# EAGLE board esp32_lora_gateway (EAGLE 9.1.3)
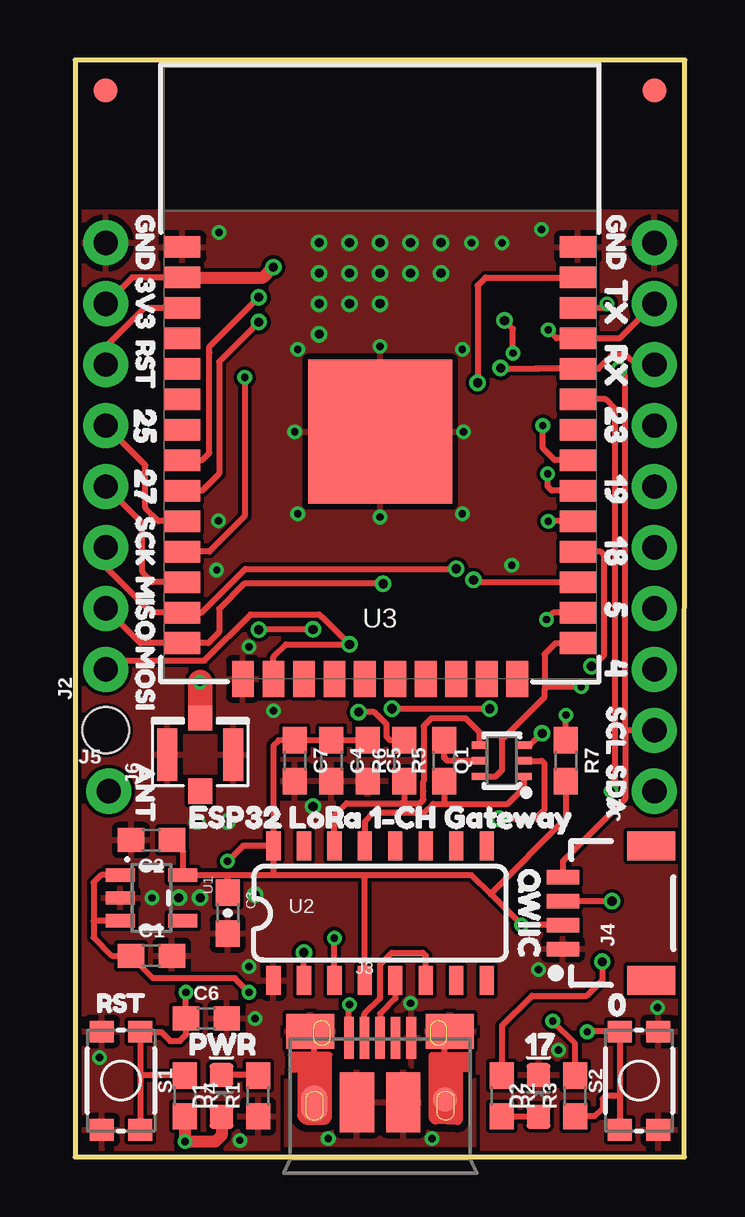
[diagram p0: board, top side]
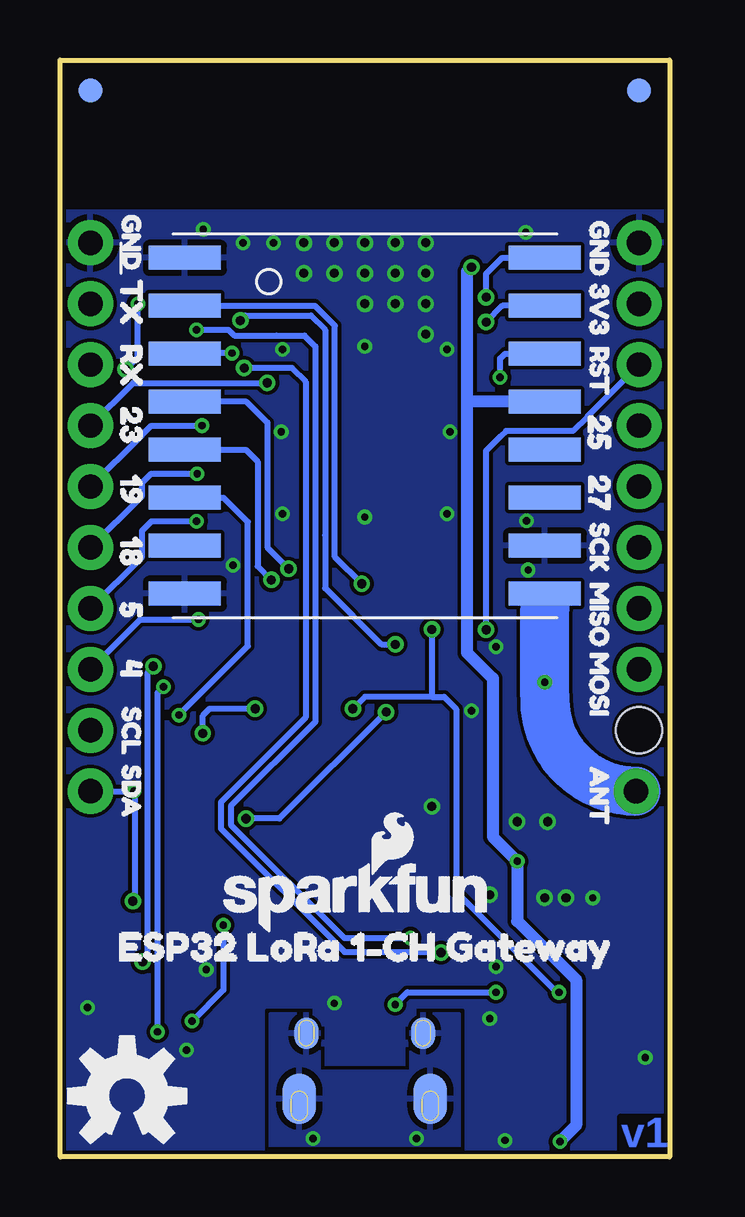
[diagram p1: board, bottom side, seen from below]

Size 25.4 x 45.72 mm. Coordinates in mm from the lower left corner, seen from the top.
Outline: 0,0 25.38,0 25.4,45.72 0,45.72 0,0
Copper layers (1*16): Top 0.035mm / dielectric 1.5mm / Bottom 0.035mm
Design rules "SparkFun-2-layer-PCBWay-LIMIT": minimum track width 6mil, minimum drill 0.3mm, track to track 6mil, track to pad 6mil, pad to pad 6mil, via to via 6mil, smd to smd 6mil, copper to edge 6mil, drill to drill 6mil, minimum pad ring 6mil, minimum via ring 6mil, stop-mask expansion 4mil, vias tented up to drill 25mil, thermal gap 10mil
Net classes: 0 default: width 0.152 mm, drill 0.305 mm; 1 power: width 0.178 mm
Holes 1.93 mm at 1.27,17.78

## Footprints (pad centres in the part's own frame; a part is rotated, then mirrored left to right if it is on the bottom)
0603 = smd 1.1 x 1: 1 -0.85,0; 2 0.85,0
0603-CAP = smd 1.1 x 1: 1 -0.85,0; 2 0.85,0
LED-0603 = smd 1 x 1: A -0.877,0; C 0.877,0
FIDUCIAL-1X2 = smd 1 x 1: 1 0,0
1X10_NO_SILK = drill 1.016 pad 1.88: 1 0,0; 2 2.54,0; 3 5.08,0; 4 7.62,0; 5 10.16,0; 6 12.7,0; 7 15.24,0; 8 17.78,0; 9 20.32,0; 10 22.86,0
1X08_NO_SILK = drill 1.016 pad 1.88: 1 0,0; 2 2.54,0; 3 5.08,0; 4 7.62,0; 5 10.16,0; 6 12.7,0; 7 15.24,0; 8 17.78,0
USB-MICROB-PTH-MILL = smd 0.4 x 1.75: D+ 0,0; D- -0.65,0; GND 1.3,0; ID 0.65,0; VBUS -1.3,0 | smd 2 x 1.46: SHIELD -2.9,0.275; SHIELD2 2.9,0.275 | smd 1.425 x 2.5: SHIELD3 -0.963,-2.675; SHIELD4 0.963,-2.675 | smd 1.4 x 2.1 bottom: SHIELD5 -2.731,-2.531; SHIELD7 2.729,-2.531 | smd 1 x 1: SHIELD6 2.7,-2.575 | smd 1.1 x 1.5: SHIELD8 -2.731,-2.731 | smd 1 x 1.3 bottom: SHIELD9 -2.43,0.195; SHIELD10 2.43,0.195
1X04_1MM_RA = smd 0.6 x 1.35: 1 -1.5,0; 2 -0.5,0; 3 0.5,0; 4 1.5,0 | smd 1.2 x 2: NC1 2.8,-3.675; NC2 -2.8,-3.675
1X01_NO_SILK = drill 1.016 pad 1.88: 1 0,0
U.FL = smd 2.2 x 0.85: 1 0,1.375; 2 0,-1.375 | smd 1.05 x 1: FEED 1.525,0; NC -1.525,0
SC70-6 = smd 0.3 x 0.66: 1 -0.65,-0.92; 2 0,-0.92; 3 0.65,-0.92; 4 0.65,0.92; 5 0,0.92; 6 -0.65,0.92
TACTILE_SWITCH_SMD_4.6X2.8MM = smd 0.9 x 1: 1 -2.05,-0.8; 2 2.05,-0.8; 3 2.05,0.8; 4 -2.05,0.8
SOT23-5 = smd 0.55 x 1.2: 1 -0.95,-1.3; 2 0,-1.3; 3 0.95,-1.3; 4 0.95,1.3; 5 -0.95,1.3
SO016 = smd 0.6 x 1.2: 1 -4.445,-2.8; 2 -3.175,-2.8; 3 -1.905,-2.8; 4 -0.635,-2.8; 5 0.635,-2.8; 6 1.905,-2.8; 7 3.175,-2.8; 8 4.445,-2.8; 9 4.445,2.8; 10 3.175,2.8; 11 1.905,2.8; 12 0.635,2.8; 13 -0.635,2.8; 14 -1.905,2.8; 15 -3.175,2.8; 16 -4.445,2.8
ESP-WROOM-32-NARROW = smd 0.9 x 1.5: 1 6.43,8.238; 2 5.16,8.238; 3 3.89,8.238; 4 2.62,8.238; 5 1.35,8.238; 6 0.08,8.238; 7 -1.19,8.238; 8 -2.46,8.238; 9 -3.73,8.238; 10 -5,8.238; 11 -6.27,8.238; 12 -7.54,8.238; 13 -8.81,8.238; 14 -10.08,8.238; 25 -10.08,-8.238; 26 -8.81,-8.238; 27 -7.54,-8.238; 28 -6.27,-8.238; 29 -5,-8.238; 30 -3.73,-8.238; 31 -2.46,-8.238; 32 -1.19,-8.238; 33 0.08,-8.238; 34 1.35,-8.238; 35 2.62,-8.238; 36 3.89,-8.238; 37 5.16,-8.238; 38 6.43,-8.238 | smd 1.5 x 0.9: 15 -11.57,5.715; 16 -11.57,4.445; 17 -11.57,3.175; 18 -11.57,1.905; 19 -11.57,0.635; 20 -11.57,-0.635; 21 -11.57,-1.905; 22 -11.57,-3.175; 23 -11.57,-4.445; 24 -11.57,-5.715 | smd 6 x 6: GND -1.27,0
RFM95/96/97/98W = smd 3 x 1: 3.3V 7.5,1; !RESET -7.5,-3; ANT 7.5,-7; DIO0 7.5,3; DIO1 7.5,5; DIO2 7.5,7; DIO3 7.5,-3; DIO4 7.5,-1; DIO5 -7.5,-5; GND@1 -7.5,7; GND@2 -7.5,-7; GND@3 7.5,-5; MISO -7.5,5; MOSI -7.5,3; NSS -7.5,-1; SCK -7.5,1

## Placement (x,y rotation side)
C1  1.0uF  [0603]  3.17,8.38 0 top
C2  1.0uF  [0603]  3.17,13.21 180 top
C3  0.1uF  [0603-CAP]  6.35,10.16 270 top
C4  0.1uF  [0603]  10.67,16.51 270 top
C5  10uF  [0603]  12.19,16.51 270 top
C6  0.1uF  [0603]  5.46,5.77 0 top
C7  4.7uF  [0603]  9.14,16.51 270 top
D1  RED  [LED-0603]  6.1,2.54 90 top
D2  BLUE  [LED-0603]  19.3,2.54 90 top
FD1  FIDUCIAL1X2  [FIDUCIAL-1X2]  24.13,44.45 0 top
FD2  FIDUCIAL1X2  [FIDUCIAL-1X2]  24.13,44.45 0 bottom
FD3  FIDUCIAL1X2  [FIDUCIAL-1X2]  1.27,44.45 0 top
FD4  FIDUCIAL1X2  [FIDUCIAL-1X2]  1.27,44.45 0 bottom
FRAME1  FRAME-LETTER  [CREATIVE_COMMONS]  2.54,-7.62 0 top  (outside the outline)
J1  [1X10_NO_SILK]  24.13,15.24 90 top
J2  [1X08_NO_SILK]  1.27,20.32 90 top
J3  USB  [USB-MICROB-PTH-MILL]  12.7,4.95 0 top
J4  QWIIC  [1X04_1MM_RA]  20.32,10.16 90 top
J5  [1X01_NO_SILK]  1.4,15.24 0 top
J6  U.FL  [U.FL]  5.21,16.76 90 top
LOGO1  OSHW-LOGOM  [OSHW-LOGO-M]  22.61,2.54 0 bottom
LOGO2  REVISION  [REVISION]  13.97,-11.43 0 top  (outside the outline)
LOGO3  SFE_LOGO_NAME.1_INCH  [SFE_LOGO_NAME_.1]  19.05,8.89 0 bottom
LOGO4  SFE_LOGO_FLAME.1_INCH  [SFE_LOGO_FLAME_.1]  12.7,11.43 0 bottom
Q1  MBT3904DW1T1  [SC70-6]  17.78,16.51 90 top
R1  1k  [0603]  7.62,2.54 90 top
R2  1k  [0603]  17.78,2.54 270 top
R3  10k  [0603]  20.83,2.54 90 top
R4  10k  [0603]  4.57,2.54 270 top
R5  10k  [0603]  15.37,16.51 90 top
R6  10k  [0603]  13.72,16.51 90 top
R7  10k  [0603]  20.45,16.51 270 top
S1  RESET  [TACTILE_SWITCH_SMD_4.6X2.8MM]  1.91,3.17 270 top
S2  0  [TACTILE_SWITCH_SMD_4.6X2.8MM]  23.5,3.17 90 top
U1  3.3V  [SOT23-5]  3.17,10.79 270 top
U2  CH340C  [SO016]  12.7,10.16 0 top
U3  ESP-WROOM-32NARROW  [ESP-WROOM-32-NARROW]  12.7,31.5 90 top
U4  RFM96W  [RFM95/96/97/98W]  12.7,30.48 0 bottom
U$1  [GND0]  2.92,39.94 270 top
U$2  [3V31]  2.92,37.34 270 top
U$3  [RST2]  2.92,34.73 270 top
U$4  [2517]  2.92,32 270 top
U$5  [279]  2.92,29.46 270 top
U$6  [SCK3]  2.92,27.37 270 top
U$7  [MISO4]  2.92,24.89 270 top
U$8  [MOSI5]  2.92,21.97 270 top
U$9  [ANT6]  2.92,17.12 270 top
U$10  [GND0]  22.54,39.94 270 top
U$11  [TX16]  22.54,37.34 270 top
U$12  [RX15]  22.54,34.67 270 top
U$13  [2314]  22.54,32.07 270 top
U$14  [1912]  22.54,29.21 270 top
U$15  [1811]  22.54,26.67 270 top
U$16  [513]  22.54,23.94 270 top
U$17  [410]  22.54,21.53 270 top
U$18  [SCL8]  22.54,19.43 270 top
U$19  [SDA7]  22.54,17.02 270 top
U$20  [RST2]  0.19,6.41 0 top
U$21  [020]  21.4,6.35 0 top
U$22  [PWR19]  3.94,4.7 0 top
U$23  [1722]  17.97,4.7 0 top
U$24  [QWIIC18]  18.92,12.95 270 top
U$25  [ESP32_LORA_1#CH_GATEWAY21]  3.94,14.16 0 top
U$26  [GND0]  22.42,39.94 270 bottom
U$27  [TX16]  22.42,37.34 270 bottom
U$28  [RX15]  22.42,34.67 270 bottom
U$29  [2314]  22.42,32.07 270 bottom
U$30  [1912]  22.42,29.21 270 bottom
U$31  [1811]  22.42,26.67 270 bottom
U$32  [513]  22.42,23.94 270 bottom
U$33  [410]  22.42,21.53 270 bottom
U$34  [SCL8]  22.42,19.43 270 bottom
U$35  [SDA7]  22.42,17.02 270 bottom
U$36  [ANT6]  2.92,16.99 270 bottom
U$37  [GND0]  2.92,39.69 270 bottom
U$38  [3V31]  2.92,37.08 270 bottom
U$39  [RST2]  2.92,34.48 270 bottom
U$40  [2517]  2.92,31.75 270 bottom
U$41  [279]  2.92,29.21 270 bottom
U$42  [SCK3]  2.92,27.11 270 bottom
U$43  [MISO4]  2.92,24.64 270 bottom
U$44  [MOSI5]  2.92,21.72 270 bottom
U$45  [ESP32_LORA_1#CH_GATEWAY23]  24,8.76 0 bottom

## Library data of the parts
C1 C2 = SparkFun-Capacitors; PROD_ID: CAP-00868
C3 C4 C6 = SparkFun-Capacitors; PROD_ID: CAP-00810
C5 = SparkFun-Capacitors; PROD_ID: CAP-11015
C7 = SparkFun-Capacitors; PROD_ID: CAP-08280
D1 = SparkFun-LED; PROD_ID: DIO-00819
D2 = SparkFun-LED; PROD_ID: DIO-08575
FD1-FD4 FRAME1 LOGO1-LOGO4 = SparkFun-Aesthetics
J1 = SparkFun-Connectors; PROD_ID: CONN-11563
J2 = SparkFun-Connectors; PROD_ID: CONN-08438
J3 = SparkFun-Connectors; PROD_ID: CONN-13711
J4 = SparkFun-Connectors; PROD_ID: CONN-13694
J5 = SparkFun-Connectors
J6 = SparkFun-Connectors; PROD_ID: CONN-09193; SF_ID: WRL-09144
Q1 = esp32-thing-temp; PROD_ID: TRANS-13337
R1 R2 = SparkFun-Resistors; PROD_ID: RES-07856
R3-R7 = SparkFun-Resistors; PROD_ID: RES-00824
S1 S2 = SparkFun-Switches; PROD_ID: SWCH-13065
U1 = SparkFun-IC-Power; PROD_ID: VREG-12457
U2 = SparkFun-IC-Comms; PROD_ID: IC-14038
U3 = esp32_lora_gateway
U4 = SparkX
U$1-U$45 = buzzard_labels

## Nets
0: Q1.6 R3.1 S2.3 S2.4 U3.25
3.3V: C2.1 C3.1 C4.1 C5.1 C7.1 D1.A J2.7 J4.2 R3.2 R4.2 R7.2 U1.5 U2.4 U2.16 U3.2 U4.3.3V
!DTR: Q1.1 R5.1 U2.13
!RTS: Q1.4 R6.1 U2.14
ANT: J5.1 J6.FEED U4.ANT
D+: J3.D+ U2.5
D-: J3.D- U2.6
GND: C1.2 C2.2 C3.2 C4.2 C5.2 C6.2 C7.2 D2.C J1.10 J2.8 J3.GND J4.1 J6.1 J6.2 R1.1 S1.1 S1.2 S2.1 S2.2 U1.2 U2.1 U3.1 U3.15 U3.38 U3.GND U4.GND@1 U4.GND@2 U4.GND@3
IO4: J1.3 U3.26
IO5: J1.4 U3.29
IO17: R2.1 U3.28
IO18: J1.5 U3.30
IO19: J1.6 U3.31
IO23: J1.7 U3.37
IO25: J2.5 U3.10
IO27: J2.4 U3.12
MISO: J2.2 U3.14 U4.MISO
MOSI: J2.1 U3.16 U4.MOSI
N$1: D1.C R1.2
N$2: D2.A R2.2
N$10: Q1.5 R5.2
N$12: Q1.2 R6.2
RESET: C6.1 J2.6 Q1.3 R4.1 S1.3 S1.4 U3.3
RFM_CS: U3.27 U4.NSS
RFM_DIO1/33: U3.9 U4.DIO1
RFM_DIO2/32: U3.8 U4.DIO2
RFM_INT/26: U3.11 U4.DIO0
RFM_RST: R7.1 U4.!RESET
RXI: J1.8 U2.2 U3.34
SCK: J2.3 U3.13 U4.SCK
SCL: J1.2 J4.4 U3.36
SDA: J1.1 J4.3 U3.33
SHIELD: J3.SHIELD J3.SHIELD2 J3.SHIELD3 J3.SHIELD4 J3.SHIELD5 J3.SHIELD6 J3.SHIELD7 J3.SHIELD8 J3.SHIELD9 J3.SHIELD10
TXO: J1.9 U2.3 U3.35
V_USB: C1.1 J3.VBUS U1.1 U1.3

## Tracks (layer width: path | path; a pad name or v marks a point on that pad's centre or on a via)
0  (via drill 0.3)
  Top 0.254: 22.7,2.54 S2.3 21.35,5.22 v21.34,5.21 | 22.7,2.54 S2.4 | R3.1 21.63,1.69 21.97,2.03 21.97,2.41 22.1,2.54 22.7,2.54 | U3.25 20.02,21.42 19.56,20.95 19.56,19.47 | v21.08,19.59 19.67,19.59 19.56,19.47 | Q1.6 17.53,15.86 17.79,16.12 17.79,17.41 19.56,19.18 19.56,19.47
  Bottom 0.254: v21.08,19.59 21.34,19.34 v21.34,5.21
3.3V  (via drill 0.3, 0.38)
  Top 0.254: C2.1 4.47,12.76 U1.5 6.35,11.74 | 6.35,11.74 8.26,11.74 | 8.26,11.74 12.06,11.74 | 12.06,11.74 16.51,11.74 17.3,10.95 | U2.16 8.26,11.74 | C3.1 6.35,11.74 | U2.4 12.06,11.74 | C5.1 C4.1 9.91,17.36 C7.1 8.47,17.36 8.26,17.14 U2.16 | 17.3,10.95 v18.59,9.66 J4.2 | U3.2 2.37,36.66 J2.7 | U2.16 6.99,12.96 v6.35,12.32 | R3.2 20.83,4.72 v19.9,5.66 | R7.2 20.45,14.1 17.3,10.95
  Top 0.508: U3.2 7.83,36.66 v8.26,37.08 | D1.A 6.1,0.89 5.84,0.64 v4.57,0.64 R4.2
  Bottom 0.254: v8.27,37.07 v8.26,37.08 | v19.9,5.66 18.59,6.96 v18.59,9.66
  Bottom 0.508: v8.26,37.08 v8.27,37.07 8.43,36.91 8.43,31.37 | 8.43,31.37 8.43,21.01 7.37,19.94 7.37,13.34 v6.35,12.32 6.35,9.83 3.9,7.38 3.9,1.31 v4.57,0.64 | U4.3.3V 8.32,31.48 8.43,31.37
!DTR
  Top 0.254: Q1.1 18.7,15.4 18.02,14.72 15.37,14.72 | 15.37,14.72 14.91,14.72 14.52,14.33 14.35,14.33 12.42,14.33 12.06,13.97 U2.13 | R5.1 15.37,14.72
!RTS
  Top 0.254: Q1.4 16.86,17.68 16.27,18.27 14.84,18.27 14.51,17.95 14.51,15.66 14.5,15.65 14.5,15.24 14.5,14.88 14.35,14.73 13.72,14.73 | U2.14 10.79,14.22 11.3,14.73 13.59,14.73 13.72,14.73 | R6.1 13.72,14.73
ANT  (via drill 0.3)
  Top 1.016: v5.2,19.79 v5.21,19.78 J6.FEED
  Bottom 1.016: 5.2,22.86 U4.ANT | v5.2,19.79 5.2,19.17 5.2,19.04
  Bottom 2.032: 5.2,19.04 arc-90 J5.1 | 5.2,19.17 5.2,22.86
D+
  Top 0.254: J3.D+ 12.7,5.97 13.34,6.6 U2.5
D-
  Top 0.254: U2.6 14.61,8.38 14.48,8.51 13.19,8.51 12.7,8.02 12.7,6.6 12.05,5.95 J3.D-
GND  (via drill 0.3, 0.38)
  other vias: 12.7,33.78 12.7,26.67 9.14,30.23 17.78,38.1 9.27,26.8 9.27,33.66 16.51,38.1 16.13,33.66 1.02,4.14 20.13,4.45 24.26,6.22 19.43,38.66 5.99,38.53 3.2,10.79 7.24,7.92 5.89,24.46 5.97,26.52 18.19,24.66 16.18,30.23 16.13,26.8 6.86,0.69 7.49,5.77 13.97,6.4 19.3,7.8 7.24,21.26 8.26,18.59 9.91,14.61 7.49,10.92 4.32,10.79 5.21,10.79 15.24,38.1 13.97,38.1 12.7,38.1 11.43,38.1 10.16,38.1 15.24,36.83 13.97,36.83 12.7,36.83 11.43,36.83 10.16,36.83 12.7,35.56 11.43,35.56 10.16,35.56 10.16,34.29 6.35,13.97 5.08,13.97
  pour Top (isolate 0.152, rank 6): 0,0 0,39.37 25.4,39.37 25.4,0
  pour Bottom (isolate 0.152, rank 6): 25.4,0 25.4,39.37 0,39.37 0,0
IO4  (via drill 0.3)
  Top 0.254: U3.26 19.92,22.69 v19.63,22.4
  Bottom 0.254: J1.3 22.05,22.4 v19.63,22.4
IO5  (via drill 0.3)
  Top 0.254: U3.29 v19.71,26.5 v19.71,26.49
  Bottom 0.254: J1.4 21.98,25.01 21.98,26.1 21.58,26.49 v19.71,26.49
IO17  (via drill 0.38)
  Top 0.254: R2.1 17.78,5.46 19.04,6.72 21.32,6.72 21.72,7.11 21.96,7.35 v21.96,8.13 | U3.28 21.89,25.23 22.02,25.09 22.02,20.91 21.56,20.45 v21.51,20.45
  Bottom 0.254: v21.96,8.13 21.74,8.34 21.74,20.21 | 21.74,20.21 v21.51,20.45 | 21.74,20.21
IO18  (via drill 0.3)
  Top 0.254: U3.30 19.86,27.77 19.68,27.94 v19.68,28.47
  Bottom 0.254: J1.5 21.98,27.55 21.98,28.1 21.6,28.47 v19.68,28.47
IO19  (via drill 0.3)
  Top 0.254: U3.31 19.99,29.04 19.48,29.54 v19.48,30.48
  Bottom 0.254: J1.6 21.98,30.09 21.98,30.1 21.59,30.48 v19.48,30.48
IO23  (via drill 0.38)
  Top 0.254: U3.37 17.1,36.66 16.76,36.32 v16.76,32.26
  Bottom 0.254: J1.7 22.35,32.26 v16.76,32.26
IO25
  Top 0.254: U3.10 3.48,26.5 2.92,27.05 2.92,28.83 J2.5
IO27
  Top 0.254: U3.12 3.22,23.96 2.79,24.38 2.79,26.42 J2.4
MISO  (via drill 0.38)
  Top 0.254: v12.83,23.89 7.04,23.89 5.99,22.84 5.99,21.87 5.54,21.42 U3.14 2.71,21.42 J2.2
  Bottom 0.254: U4.MISO 14.78,35.48 13.95,34.65 13.95,25.01 v12.83,23.89
MOSI  (via drill 0.3, 0.38)
  Top 0.254: v18.24,33.5 18.24,34.51 v17.89,34.86 | U3.16 8.26,20.83 8.79,21.36 v11.43,21.36 10.3,22.49 10.28,22.49 10.16,22.61 7.3,22.61 5.38,20.69 1.64,20.69 J2.1
  Bottom 0.254: v18.24,33.5 20.04,33.5 20.18,33.5 U4.MOSI | v11.43,21.36 12.01,21.36 14.35,23.71 14.35,25.91 14.35,34.48 14.95,35.07 17.67,35.07 v17.89,34.86
N$1
  Top 0.254: 7.59,3.42 6.86,3.42 | 6.86,3.42 D1.C | R1.2 7.59,3.42 | 7.59,3.42 6.86,3.42
N$2
  Top 0.254: D2.A 17.81,1.66 R2.2
N$10
  Top 0.254: Q1.5 15.49,16.51 15.37,16.64 R5.2
N$12  (via drill 0.38)
  Top 0.254: v11.81,18.54 12.46,18.54 12.97,18.03 12.97,17.51 13.12,17.36 R6.2 | v17.65,14.1 19.18,14.1 19.56,14.48 19.56,16.38 19.43,16.51 Q1.2
  Bottom 0.254: v17.65,14.1 16.26,14.1 v11.81,18.54
RESET  (via drill 0.3, 0.38)
  Top 0.254: U3.3 2.87,35.39 1.27,33.78 J2.6 | Q1.3 18.96,17.16 v19.45,17.65 | v13.2,18.68 v17.27,18.68 | v9.91,21.98 7.66,21.98 v7.64,21.97 | 2.71,3.43 S1.3 | R4.1 2.74,3.39 | 2.74,3.39 2.71,3.43 | v4.61,6.86 C6.1 4.61,5.08 4.36,4.83 3.96,4.83 3.57,5.21 2.71,5.21 S1.4 2.71,3.43 | 2.71,3.43 2.74,3.39
  Bottom 0.254: v4.61,6.86 4.7,6.86 8.89,11.05 8.89,18.67 9.4,19.18 9.91,19.18 | 9.91,19.18 12.7,19.18 v13.2,18.68 | J2.6 3.42,30.87 3.42,30.86 4.03,30.26 6.82,30.26 7.04,30.04 7.64,29.43 v7.64,21.97 | v19.45,17.65 19.45,18.39 19.16,18.68 v17.27,18.68 | v9.91,21.98 9.91,19.18
RFM_CS  (via drill 0.38)
  Top 0.254: U3.27 18.29,23.96 16.68,23.96 v16.59,24.05
  Bottom 0.254: U4.NSS 17.67,29.48 17.17,28.98 17.17,24.62 v16.59,24.05
RFM_DIO1/33  (via drill 0.38)
  Top 0.254: v7.64,34.8 5.99,33.15 5.99,28.47 5.29,27.77 U3.9
  Bottom 0.254: U4.DIO1 6.96,35.48 v7.64,34.8
RFM_DIO2/32  (via drill 0.38)
  Top 0.254: U3.8 5.29,29.04 5.59,29.34 5.59,33.53 5.59,33.77 v7.64,35.83
  Bottom 0.254: U4.DIO2 6.97,37.48 7.64,36.8 v7.64,35.83
RFM_INT/26  (via drill 0.3)
  Top 0.254: U3.11 5.58,25.23 7.06,26.7 v7.06,32.49
  Bottom 0.254: U4.DIO0 6.86,33.48 7.06,33.28 v7.06,32.49
RFM_RST  (via drill 0.3)
  Top 0.254: R7.1 v20.45,18.41
  Bottom 0.254: U4.!RESET 18.59,27.48 17.58,26.47 17.58,21.29 v20.45,18.41
RXI  (via drill 0.38)
  Top 0.254: 19.3,32.85 U3.34 21.8,32.85 22.4,33.45 22.92,33.45 23.35,33.02 J1.8 | 19.3,32.85 19.18,32.85 | 19.3,32.85 19.18,32.85 | v17.73,32.88 17.76,32.85 19.18,32.85 | U2.2 v9.53,8.51
  Bottom 0.254: v17.73,32.88 15.74,32.88 15.16,32.31 15.16,18.3 18.68,14.79 18.68,13.72 | 18.68,13.67 18.68,13.72 | v9.53,8.51 9.55,8.53 13.54,8.53 18.68,13.67 | 18.68,13.72 18.68,13.67
SCK  (via drill 0.38)
  Top 0.254: v15.88,24.51 7.09,24.51 5.27,22.69 U3.13 3.17,22.69 1.27,24.58 J2.3
  Bottom 0.254: U4.SCK 17.64,31.48 16.76,30.61 16.76,25.4 v15.88,24.51
SCL  (via drill 0.3, 0.38)
  Top 0.254: J4.4 20.32,12.32 22.91,14.91 22.91,17.78 | J1.2 22.91,17.78 | v22.66,32.83 22.91,32.58 22.91,30.48 22.91,17.78 | v22.16,35.56 21.98,35.39 U3.36
  Bottom 0.254: v22.66,32.83 22.16,33.33 v22.16,35.56
SDA  (via drill 0.3, 0.38)
  Top 0.254: J4.3 v22.36,10.66 | U3.33 22.1,31.58 22.5,31.17 22.5,15.42 v22.33,15.24
  Bottom 0.254: J1.1 v22.33,15.24 22.29,15.2 22.29,10.74 v22.36,10.66
SHIELD  (via drill 0.3)
  Top 0.254: J3.SHIELD6 15.4,5.03 J3.SHIELD2 | J3.SHIELD8 9.97,5.06 J3.SHIELD
  other vias: 10.54,0.76 14.86,0.76
  pour Top (isolate 0.305): 8.76,0 8.76,5.97 10.79,5.97 10.79,3.56 14.61,3.56 14.61,5.97 16.64,5.97 16.64,0.13 16.51,0
  pour Bottom (isolate 0.305): 16.64,0 16.64,5.97 14.61,5.97 14.61,3.56 10.79,3.56 10.79,5.97 8.76,5.97 8.76,0
TXO  (via drill 0.3)
  Top 0.254: U2.3 v10.79,9.12 | v19.71,34.47 20.06,34.12 U3.35 22.69,34.12 J1.9
  Bottom 0.254: v19.71,34.47 18.38,34.47 18.14,34.23 16.38,34.23 16.37,34.24 15.21,34.24 14.76,33.78 14.76,25.53 14.76,18.14 18.27,14.62 18.27,13.84 13.55,9.12 v10.79,9.12
V_USB  (via drill 0.3)
  Top 0.254: J3.VBUS 11.4,6.32 v11.43,6.35 | U1.1 1.08,11.74 0.76,11.43 0.76,9.85 | 0.76,9.85 0.76,9.14 1.52,8.38 C1.1 2.33,8.36 3.24,7.44 6.66,7.44 v7.24,6.86 | U1.3 0.76,9.85
  Bottom 0.254: v11.43,6.35 10.92,6.86 v7.24,6.86

## Text on the board
Bottom: v1
tDocu: Jim Lindblom | Owen Lyke